# Altium PCB cross_stm_PCB.PcbDoc
Units mm, origin at the board's own origin, x right, y up, seen from the top; angles counter-clockwise.
Board outline 62.1 x 74 mm, 2 copper layers (Top Layer, Bottom Layer); 20 components, 87 nets, 132 pads, 0 vias.
Unrouted connection lines stored in the file: 3.
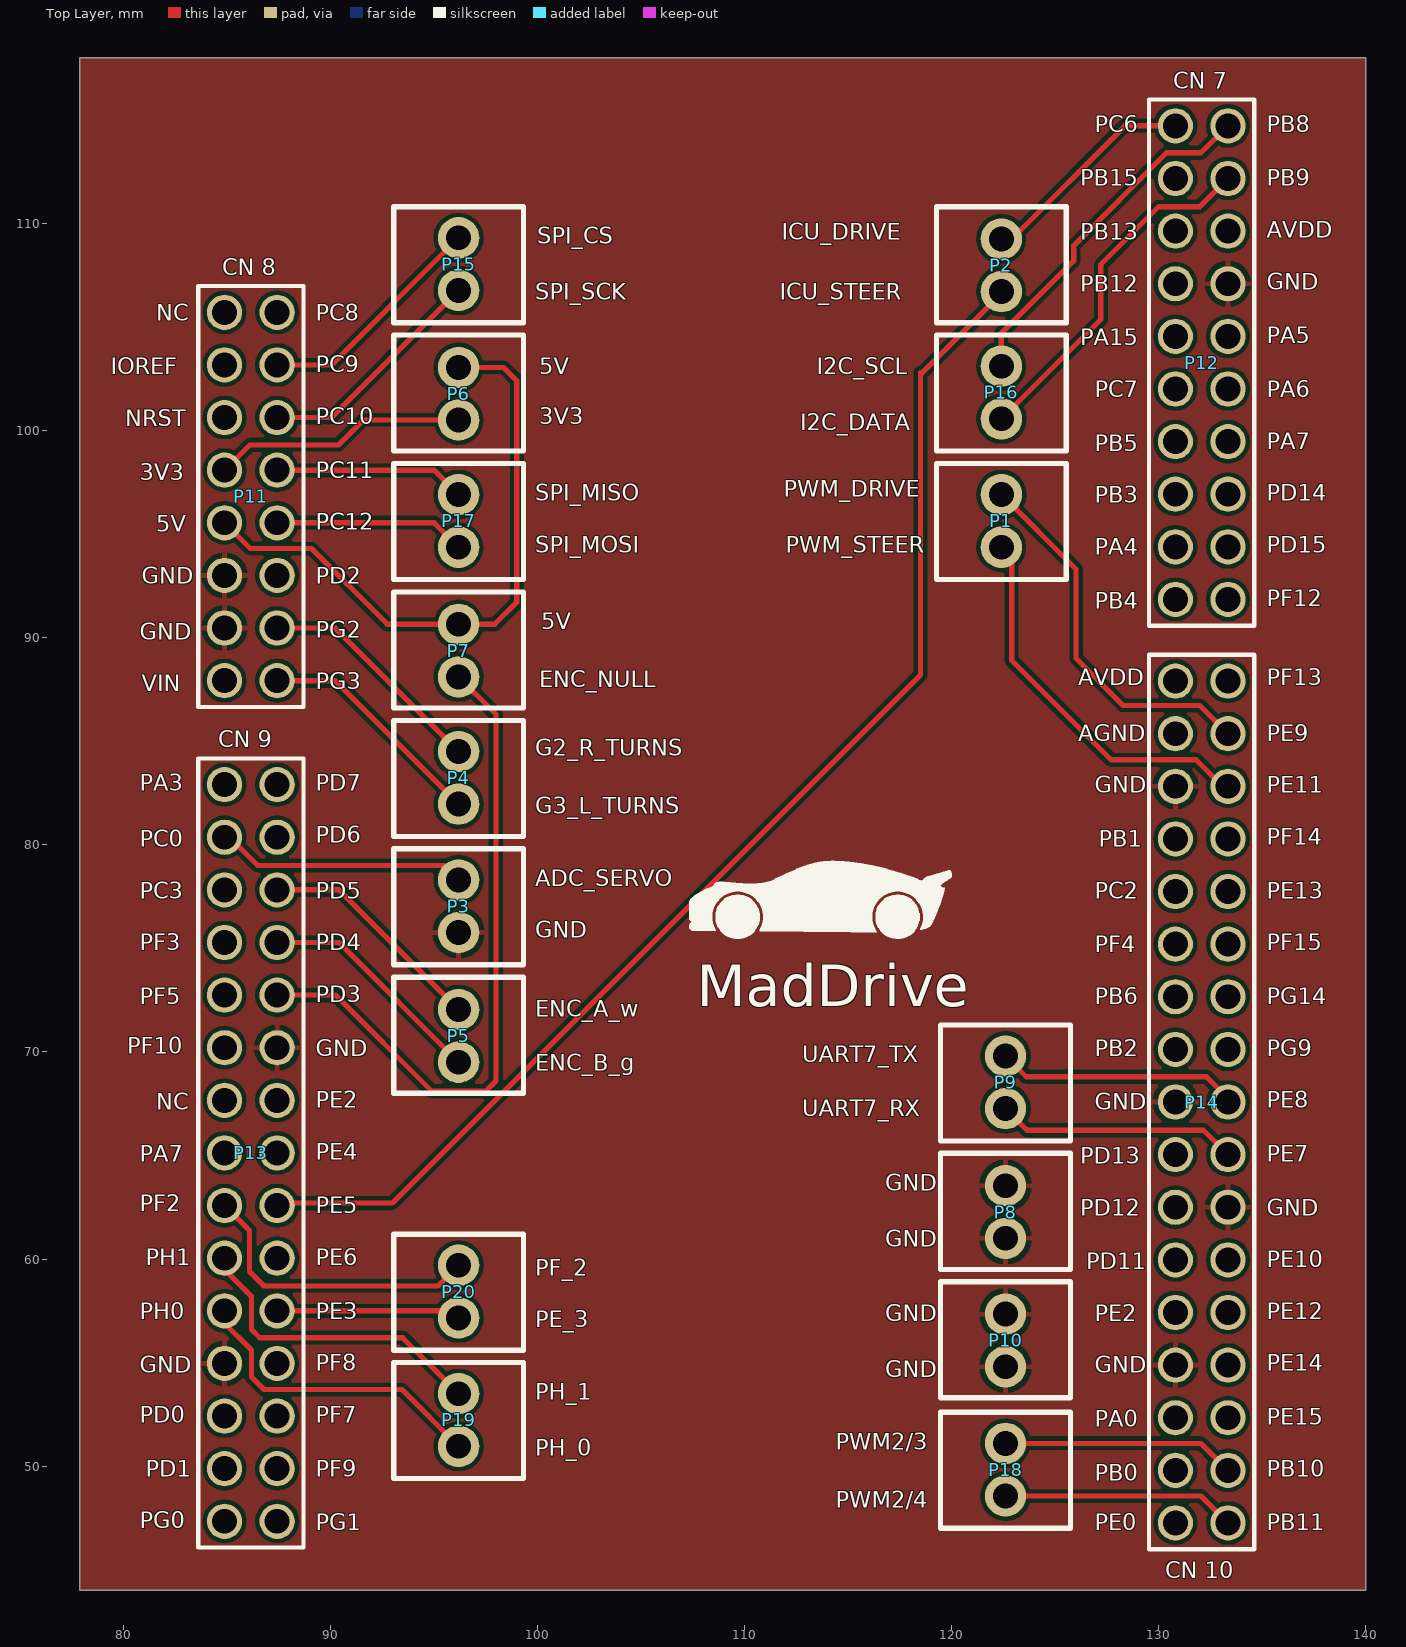
[diagram p0: Top Layer view]
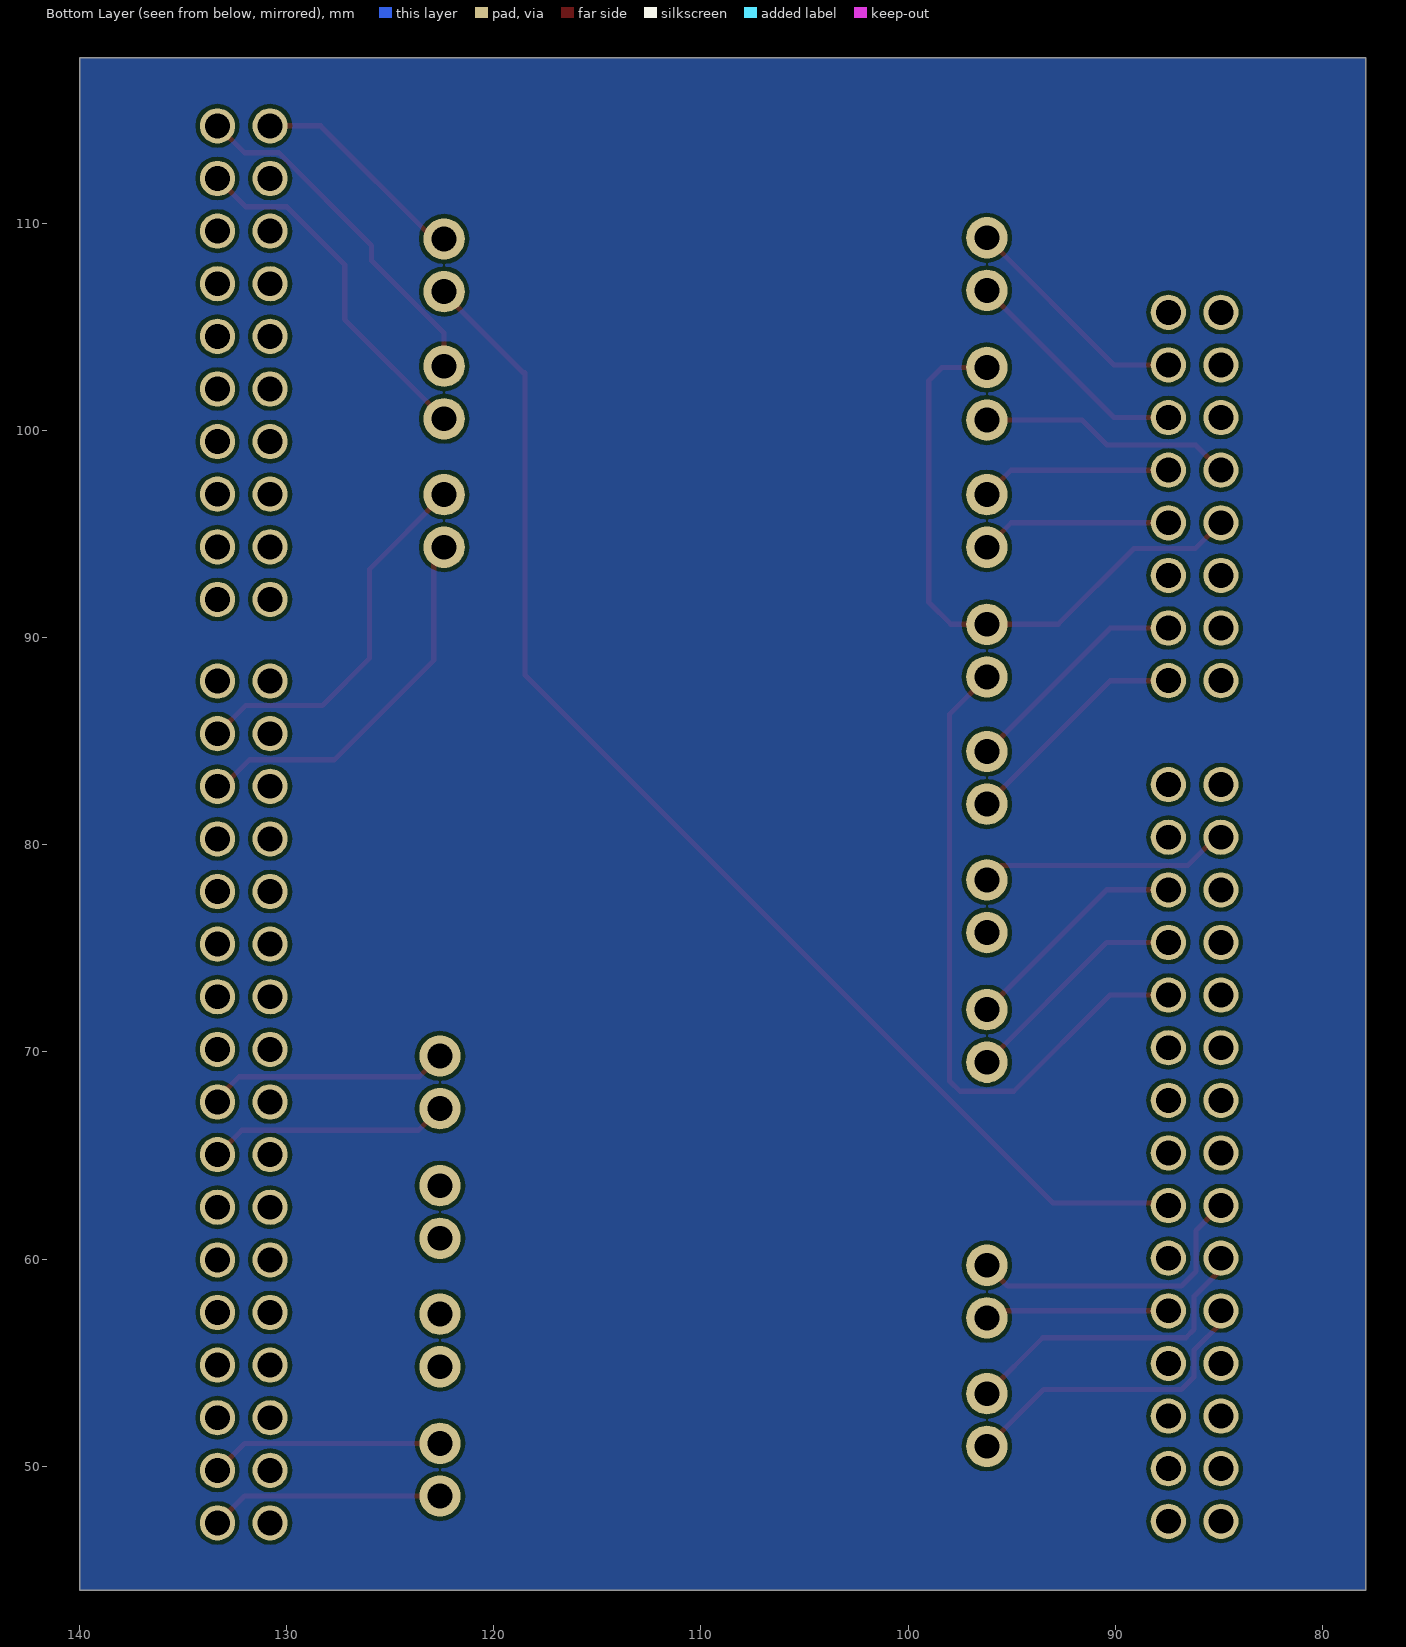
[diagram p1: Bottom Layer view, seen from below]

## Layer stack, top to bottom
Top Solder: solder mask 0.0102, Solder Resist, Dk 3.5
Top Layer: signal copper 0.0356
Dielectric 1: dielectric 0.32, FR-4, Dk 4.8
Bottom Layer: signal copper 0.0356
Bottom Solder: solder mask 0.0102, Solder Resist, Dk 3.5

## Board outline
77.9,44 77.9,118 140,118 140,44

## Design rules (kind name [scope] priority, off if disabled: settings)
Clearance [All] p1: gap=0.2
PolygonConnect [All] p1: connectstyle=Relief reliefconductorwidth=0.254 reliefentries=4 polygonreliefangle="90 Angle" airgapwidth=0.254
RoutingVias [All] p1: holewidth=0.711 width=1.27 viastyle="Through Hole" minholewidth=0.711 minwidth=1.27 maxholewidth=0.711 maxwidth=1.27
SolderMaskExpansion [All] p1: expansion=0.102
Width [All] p1: maxlimit=0.254 minlimit=0.254 preferedwidth=0.254
30 further rules are at their usual default settings.

## Components (designator, comment, footprint, x,y, rotation, side; value= is the part's Value field where it differs from the comment)
P1 "PWM" DG308-2.54-02P 122.4,96.9 r270 top
P2 "ICU" DG308-2.54-02P 122.4,106.7 r90 top
P3 "ADC" DG308-2.54-02P 96.2,78.3 r270 top
P4 "TURNS" DG308-2.54-02P 96.2,84.5 r270 top
P5 "ENC" DG308-2.54-02P 96.2,69.5 r90 top
P6 "POWER" DG308-2.54-02P 96.2,100.5 r90 top
P7 "ENC_N" DG308-2.54-02P 96.2,88.1 r90 top
P8 "GND" DG308-2.54-02P 122.6,61 r90 top
P9 "UART" DG308-2.54-02P 122.6,69.8 r270 top
P10 "GND" DG308-2.54-02P 122.6,54.8 r90 top
P11 "CN8" HDR2X8 84.9,105.7 r270 top
P12 "CN7" HDR2X10 130.8,114.7 r270 top
P13 "CN9" HDR2X15 84.9,82.9 r270 top locked
P14 "CN10" HDR2X17 130.8,87.9 r270 top
P15 "SPI" DG308-2.54-02P 96.2,109.3 r270 top
P16 "I2C" DG308-2.54-02P 122.4,103.1 r270 top
P17 "SPI" DG308-2.54-02P 96.2,96.9 r270 top
P18 "PWM" DG308-2.54-02P 122.6,51.1 r270 top
P19 "DG308-2.54-02P" DG308-2.54-02P 96.2,53.5 r270 top
P20 "DG308-2.54-02P" DG308-2.54-02P 96.2,59.7 r270 top

## Footprints (in the part's own frame and the unit in brackets; to place one, negate y for a bottom-side part, rotate by r counter-clockwise, add the part's x,y. Pads: shape width x height; smd on the part's side, far side on the other; paste and mask are expansions set on the pad)
DG308-2.54-02P [mm]
  round 2 hole 1.2: 1(0,0) 2(2.54,0)
  silkscreen extent -1.5,-3.14 4.1,3.14
HDR2X8 [mm] "Connector; Header; 8x2 Position"
  round 1.7 hole 1.2: 1(0,0) 2(0,2.54) 3(2.54,0) 4(2.54,2.54) 5(5.08,0) 6(5.08,2.54) 7(7.62,0) 8(7.62,2.54) 9(10.16,0) 10(10.16,2.54) 11(12.7,0) 12(12.7,2.54) 13(15.24,0) 14(15.24,2.54) 15(17.78,0) 16(17.78,2.54)
  silkscreen extent -1.27,-1.27 19.05,3.81
HDR2X10 [mm] "Connector; Header; 10x2 Position"
  round 1.7 hole 1.2: 1(0,0) 2(0,2.54) 3(2.54,0) 4(2.54,2.54) 5(5.08,0) 6(5.08,2.54) 7(7.62,0) 8(7.62,2.54) 9(10.16,0) 10(10.16,2.54) 11(12.7,0) 12(12.7,2.54) 13(15.24,0) 14(15.24,2.54) 15(17.78,0) 16(17.78,2.54) 17(20.32,0) 18(20.32,2.54) 19(22.86,0) 20(22.86,2.54)
  silkscreen extent -1.27,-1.27 24.13,3.81
HDR2X15 [mm] "Connector; Header; 15x2 Position"
  round 1.7 hole 1.2: 1(0,0) 2(0,2.54) 3(2.54,0) 4(2.54,2.54) 5(5.08,0) 6(5.08,2.54) 7(7.62,0) 8(7.62,2.54) 9(10.16,0) 10(10.16,2.54) 11(12.7,0) 12(12.7,2.54) 13(15.24,0) 14(15.24,2.54) 15(17.78,0) 16(17.78,2.54) 17(20.32,0) 18(20.32,2.54) 19(22.86,0) 20(22.86,2.54) 21(25.4,0) 22(25.4,2.54) 23(27.94,0) 24(27.94,2.54) 25(30.48,0) 26(30.48,2.54) 27(33.02,0) 28(33.02,2.54) 29(35.56,0) 30(35.56,2.54)
  silkscreen extent -1.27,-1.27 36.83,3.81
HDR2X17 [mm] "Connector; Header; 17x2 Position"
  round 1.7 hole 1.2: 1(0,0) 2(0,2.54) 3(2.54,0) 4(2.54,2.54) 5(5.08,0) 6(5.08,2.54) 7(7.62,0) 8(7.62,2.54) 9(10.16,0) 10(10.16,2.54) 11(12.7,0) 12(12.7,2.54) 13(15.24,0) 14(15.24,2.54) 15(17.78,0) 16(17.78,2.54) 17(20.32,0) 18(20.32,2.54) 19(22.86,0) 20(22.86,2.54) 21(25.4,0) 22(25.4,2.54) 23(27.94,0) 24(27.94,2.54) 25(30.48,0) 26(30.48,2.54) 27(33.02,0) 28(33.02,2.54) 29(35.56,0) 30(35.56,2.54) 31(38.1,0) 32(38.1,2.54) 33(40.64,0) 34(40.64,2.54)
  silkscreen extent -1.27,-1.27 41.91,3.81

## Part data
P1 P2 P3 P4 P5 P6 P7 P8 P9 P10 P15 P16 P17 P18: library part DG308-2.54-02P
P11: library part "Header 8X2", "Header, 8-Pin, Dual row"
P12: library part "Header 10X2", "Header, 10-Pin, Dual row"
P13: library part "Header 15X2", "Header, 15-Pin, Dual row"
P14: library part "Header 17X2", "Header, 17-Pin, Dual row"

## Nets (pads, with @x,y where several pads share a name; then routed paths per layer and width w, separated by ;. In a path a pad name is that pad's centre, name@x,y a point inside that pad or via, vN(x,y) a via of type N, cw(c..) or ccw(c..) an arc to the next point about the centre after c; other vN are vias at no path point)
GND: P3.2 P8.1 P8.2 P10.1 P10.2 P11.11 P11.13 P12.8 P13.12 P13.23 P14.5 P14.17 P14.22 P14.27
NetP1_1: P1.1 P14.4 | length 18.2
  Top Layer w0.254: P1.1 126,93.3 126,89 128.277,86.723 131.977,86.723 P14.4
NetP1_2: P1.2 P14.6 | length 18.4
  Top Layer w0.254: P1.2@122.9,94.36 122.9,88.9 127.7,84.1 131.8,84.1 133.08,82.82 P14.6
NetP2_1: P2.1 P13.18 | length 61.7
  Top Layer w0.254: P13.18@87.44,62.7 93,62.7 118.5,88.2 118.5,102.8 ; 118.5,102.7 P2.1@122.4,106.6
NetP2_2: P2.2 P12.1 | length 10.2
  Top Layer w0.254: P2.2@122.9,109.24 128.36,114.7 P12.1
NetP3_1: P3.1 P13.3 | length 12.2
  Top Layer w0.254: P13.3 85.14,80.36 86.503,78.997 95.503,78.997 P3.1
NetP4_1: P4.1 P11.14 | length 11.2
  Top Layer w0.254: P11.14 90.24,90.46 P4.1
NetP4_2: P4.2 P11.16 | length 11.2
  Top Layer w0.254: P11.16 90.24,87.92 P4.2
NetP5_1: P5.1 P13.8 | length 11.2
  Top Layer w0.254: P13.8 90.42,75.28 P5.1
NetP5_2: P5.2 P13.6 | length 11.2
  Top Layer w0.254: P13.6 90.42,77.82 P5.2
NetP6_1: P6.1 P11.7 | length 12.3
  Top Layer w0.254: P11.7 86.12,99.3 90.4,99.3 91.6,100.5 P6.1
NetP6_2: P6.2 P7.2 P11.9 | length 30.3
  Top Layer w0.254: P11.9 86.14,94.3 89.1,94.3 92.76,90.64 P7.2 97.94,90.64 99,91.7 99,102.4 98.36,103.04 P6.2
NetP7_1: P7.1 P13.10 | length 32.9
  Top Layer w0.254: P13.10 90.26,72.74 94.9,68.1 97.5,68.1 98,68.6 98,86.3 P7.1
NetP9_1: P9.1 P14.18 | length 11.8
  Top Layer w0.254: P9.1 123.6,68.8 132.3,68.8 133.34,67.76 P14.18
NetP9_2: P9.2 P14.20 | length 11.7
  Top Layer w0.254: P9.2 123.643,66.217 132.163,66.217 P14.20
NetP11_2: P11.2
NetP11_3: P11.3
NetP11_4: P11.4 P15.1 | length 11.3
  Top Layer w0.254: P11.4 90.06,103.16 P15.1
NetP11_5: P11.5
NetP11_6: P11.6 P15.2 | length 11.3
  Top Layer w0.254: P11.6 90.06,100.62 P15.2
NetP11_8: P11.8 P17.1 | length 9.2
  Top Layer w0.254: P11.8 95.02,98.08 P17.1
NetP11_10: P11.10 P17.2 | length 9.2
  Top Layer w0.254: P11.10 95.02,95.54 P17.2
NetP11_12: P11.12
NetP11_15: P11.15
NetP12_2: P12.2 P16.1 | length 17.1
  Top Layer w0.254: P16.1 122.4,104.694 125.9,108.194 125.9,108.925 130.375,113.4 132.04,113.4 P12.2
NetP12_3: P12.3
NetP12_4: P12.4 P16.2 | length 17.3
  Top Layer w0.254: P16.2 127.2,105.36 127.2,108 130,110.8 131.98,110.8 P12.4
NetP12_5: P12.5
NetP12_6: P12.6 P14.1
NetP12_7: P12.7
NetP12_9: P12.9
NetP12_10: P12.10
NetP12_11: P12.11
NetP12_12: P12.12
NetP12_13: P12.13
NetP12_14: P12.14 P13.15
NetP12_15: P12.15
NetP12_16: P12.16
NetP12_17: P12.17
NetP12_18: P12.18
NetP12_19: P12.19
NetP12_20: P12.20
NetP13_1: P13.1
NetP13_2: P13.2
NetP13_4: P13.4
NetP13_5: P13.5
NetP13_7: P13.7
NetP13_9: P13.9
NetP13_11: P13.11
NetP13_14: P13.14 P14.25
NetP13_16: P13.16
NetP13_17: P13.17 P20.1 | length 14.5
  Top Layer w0.254: P13.17 86.1,61.38 86.1,59.4 86.8,58.7 95.2,58.7 P20.1
NetP13_19: P13.19 P19.1 | length 15.3
  Top Layer w0.254: P13.19 84.9,59.5 86.2,58.2 86.2,56.6 86.6,56.2 93.5,56.2 P19.1
NetP13_20: P13.20
NetP13_21: P13.21 P19.2 | length 15.1
  Top Layer w0.254: P13.21 84.9,56.9 86.2,55.6 86.2,54.3 86.8,53.7 93.46,53.7 P19.2
NetP13_22: P13.22 P20.2 | length 8.9
  Top Layer w0.254: P13.22 95.86,57.5 P20.2
NetP13_24: P13.24
NetP13_25: P13.25
NetP13_26: P13.26
NetP13_27: P13.27
NetP13_28: P13.28
NetP13_29: P13.29
NetP13_30: P13.30
NetP14_2: P14.2
NetP14_3: P14.3
NetP14_7: P14.7
NetP14_8: P14.8
NetP14_9: P14.9
NetP14_10: P14.10
NetP14_11: P14.11
NetP14_12: P14.12
NetP14_13: P14.13
NetP14_14: P14.14
NetP14_15: P14.15
NetP14_16: P14.16
NetP14_19: P14.19
NetP14_21: P14.21
NetP14_23: P14.23
NetP14_24: P14.24
NetP14_26: P14.26
NetP14_28: P14.28
NetP14_29: P14.29
NetP14_30: P14.30
NetP14_31: P14.31
NetP14_32: P14.32 P18.1 | length 11.3
  Top Layer w0.254: P18.1 132.04,51.1 P14.32
NetP14_33: P14.33
NetP14_34: P14.34 P18.2 | length 11.3
  Top Layer w0.254: P18.2 132.04,48.56 P14.34
pads on no net: P11.1 P13.13

## Polygon pours and split planes (outlines as drawn)
GND on Top Layer "GND" (solid, pour order 0): 140,118 140,44 77.9,44 77.9,46.1 77.9,118
no net on Bottom Layer "GND" (solid, pour order 2): 77.9,118 140,118 140,44 77.9,44

## Silkscreen, mask and mechanical layers (free items; w line width, h text height)
Top Overlay:
  drawing of 477 lines, arcs and shapes, not listed
  text "CN 7" at 130.7,116.5 h0.8
  text "PC6" at 126.9,114.4 h0.8
  text "PB8" at 135.2,114.4 h0.8
  text "PB15" at 126.2,111.8 h0.8
  text "PB9" at 135.2,111.8 h0.8
  text "AVDD" at 135.2,109.3 h0.8
  text "ICU_DRIVE" at 111.8,109.2 h0.8
  text "PB13" at 126.2,109.2 h0.8
  text "SPI_CS" at 100,109 h0.8
  text "CN 8" at 84.8,107.5 h0.8
  text "GND" at 135.2,106.8 h0.8
  text "PB12" at 126.2,106.7 h0.8
  text "SPI_SCK" at 99.9,106.3 h0.8
  text "ICU_STEER" at 111.7,106.3 h0.8
  text "NC" at 81.6,105.3 h0.8
  text "PC8" at 89.3,105.3 h0.8
  text "PA5" at 135.2,104.2 h0.8
  text "PA15" at 126.2,104.1 h0.8
  text "PC9" at 89.3,102.8 h0.8
  text "IOREF" at 79.4,102.7 h0.8
  text "5V" at 100.1,102.7 h0.8
  text "I2C_SCL" at 113.5,102.7 h0.8
  text "PC7" at 126.9,101.6 h0.8
  text "PA6" at 135.2,101.6 h0.8
  text "PC10" at 89.3,100.3 h0.8
  text "3V3" at 100.1,100.3 h0.8
  text "NRST" at 80.1,100.2 h0.8
  text "I2C_DATA" at 112.7,100 h0.8
  text "PA7" at 135.2,99.1 h0.8
  text "PB5" at 126.9,99 h0.8
  text "PC11" at 89.3,97.7 h0.8
  text "3V3" at 80.8,97.6 h0.8
  text "PWM_DRIVE" at 111.9,96.8 h0.8
  text "SPI_MISO" at 99.9,96.6 h0.8
  text "PD14" at 135.2,96.6 h0.8
  text "PB3" at 126.9,96.5 h0.8
  text "PC12" at 89.3,95.2 h0.8
  text "5V" at 81.6,95.1 h0.8
  text "SPI_MOSI" at 99.9,94.1 h0.8
  text "PWM_STEER" at 112,94.1 h0.8
  text "PD15" at 135.2,94.1 h0.8
  text "PA4" at 126.9,94 h0.8
  text "GND" at 80.9,92.6 h0.8
  text "PD2" at 89.3,92.6 h0.8
  text "PF12" at 135.2,91.5 h0.8
  text "PB4" at 126.9,91.4 h0.8
  text "5V" at 100.2,90.4 h0.8
  text "PG2" at 89.3,90 h0.8
  text "GND" at 80.8,89.9 h0.8
  text "AVDD" at 126.1,87.7 h0.8
  text "PF13" at 135.2,87.7 h0.8
  text "ENC_NULL" at 100.1,87.6 h0.8
  text "PG3" at 89.3,87.5 h0.8
  text "VIN" at 80.9,87.4 h0.8
  text "AGND" at 126.1,85 h0.8
  text "PE9" at 135.2,85 h0.8
  text "CN 9" at 84.6,84.7 h0.8
  text "G2_R_TURNS" at 99.9,84.3 h0.8
  text "PA3" at 80.8,82.6 h0.8
  text "PD7" at 89.3,82.6 h0.8
  text "GND" at 126.9,82.5 h0.8
  text "PE11" at 135.2,82.5 h0.8
  text "G3_L_TURNS" at 99.9,81.5 h0.8
  text "PD6" at 89.3,80.1 h0.8
  text "PF14" at 135.2,80 h0.8
  text "PC0" at 80.8,79.9 h0.8
  text "PB1" at 127.1,79.9 h0.8
  text "ADC_SERVO" at 99.9,78 h0.8
  text "PC3" at 80.8,77.4 h0.8
  text "PD5" at 89.3,77.4 h0.8
  text "PC2" at 126.9,77.4 h0.8
  text "PE13" at 135.2,77.4 h0.8
  text "GND" at 99.9,75.5 h0.8
  text "PF3" at 80.8,74.9 h0.8
  text "PD4" at 89.3,74.9 h0.8
  text "PF15" at 135.2,74.9 h0.8
  text "PF4" at 126.9,74.8 h0.8
  text "PD3" at 89.3,72.4 h0.8
  text "PF5" at 80.8,72.3 h0.8
  text "PB6" at 126.9,72.3 h0.8
  text "PG14" at 135.2,72.3 h0.8
  text "MadDrive" at 107.7,72.2 h2
  text "ENC_A_w" at 99.9,71.7 h0.8
  text "PF10" at 80.2,69.9 h0.8
  text "GND" at 89.3,69.8 h0.8
  text "PB2" at 126.9,69.8 h0.8
  text "PG9" at 135.2,69.8 h0.8
  text "UART7_TX" at 112.8,69.5 h0.8
  text "ENC_B_g" at 99.9,69.1 h0.8
  text "PE2" at 89.3,67.3 h0.8
  text "PE8" at 135.2,67.3 h0.8
  text "NC" at 81.6,67.2 h0.8
  text "GND" at 126.9,67.2 h0.8
  text "UART7_RX" at 112.8,66.9 h0.8
  text "PE4" at 89.3,64.8 h0.8
  text "PA7" at 80.8,64.7 h0.8
  text "PE7" at 135.2,64.7 h0.8
  text "PD13" at 126.2,64.6 h0.8
  text "GND" at 116.8,63.3 h0.8
  text "PF2" at 80.8,62.3 h0.8
  text "PE5" at 89.3,62.2 h0.8
  text "PD12" at 126.2,62.1 h0.8
  text "GND" at 135.2,62.1 h0.8
  text "GND" at 116.8,60.6 h0.8
  text "PH1" at 81.1,59.7 h0.8
  text "PE6" at 89.3,59.7 h0.8
  text "PE10" at 135.2,59.6 h0.8
  text "PD11" at 126.5,59.5 h0.8
  text "PF_2" at 99.9,59.2 h0.8
  text "PH0" at 80.8,57.1 h0.8
  text "PE3" at 89.3,57.1 h0.8
  text "PE12" at 135.2,57.1 h0.8
  text "GND" at 116.8,57 h0.8
  text "PE2" at 126.9,57 h0.8
  text "PE_3" at 99.9,56.7 h0.8
  text "PF8" at 89.3,54.6 h0.8
  text "PE14" at 135.2,54.6 h0.8
  text "GND" at 80.8,54.5 h0.8
  text "GND" at 126.9,54.5 h0.8
  text "GND" at 116.8,54.3 h0.8
  text "PH_1" at 99.9,53.2 h0.8
  text "PD0" at 80.8,52.1 h0.8
  text "PF7" at 89.3,52.1 h0.8
  text "PE15" at 135.2,52 h0.8
  text "PA0" at 126.9,51.9 h0.8
  text "PWM2/3" at 114.4,50.8 h0.8
  text "PH_0" at 99.9,50.5 h0.8
  text "PD1" at 81.1,49.5 h0.8
  text "PF9" at 89.3,49.5 h0.8
  text "PB10" at 135.2,49.5 h0.8
  text "PB0" at 126.9,49.3 h0.8
  text "PWM2/4" at 114.4,48 h0.8
  text "PG0" at 80.8,47 h0.8
  text "PG1" at 89.3,46.9 h0.8
  text "PE0" at 126.9,46.9 h0.8
  text "PB11" at 135.2,46.9 h0.8
  text "CN 10" at 130.3,44.6 h0.8
Mechanical 1:
  the board outline again, w0.254